# Altium PCB VRM_BRD.PcbDoc
Units mil, origin at the board's own origin, x right, y up, seen from the top; angles counter-clockwise.
Board outline 3500 x 2000 mil, 2 copper layers (Top Layer, Bottom Layer); 16 components, 9 nets, 56 pads, 5 vias.
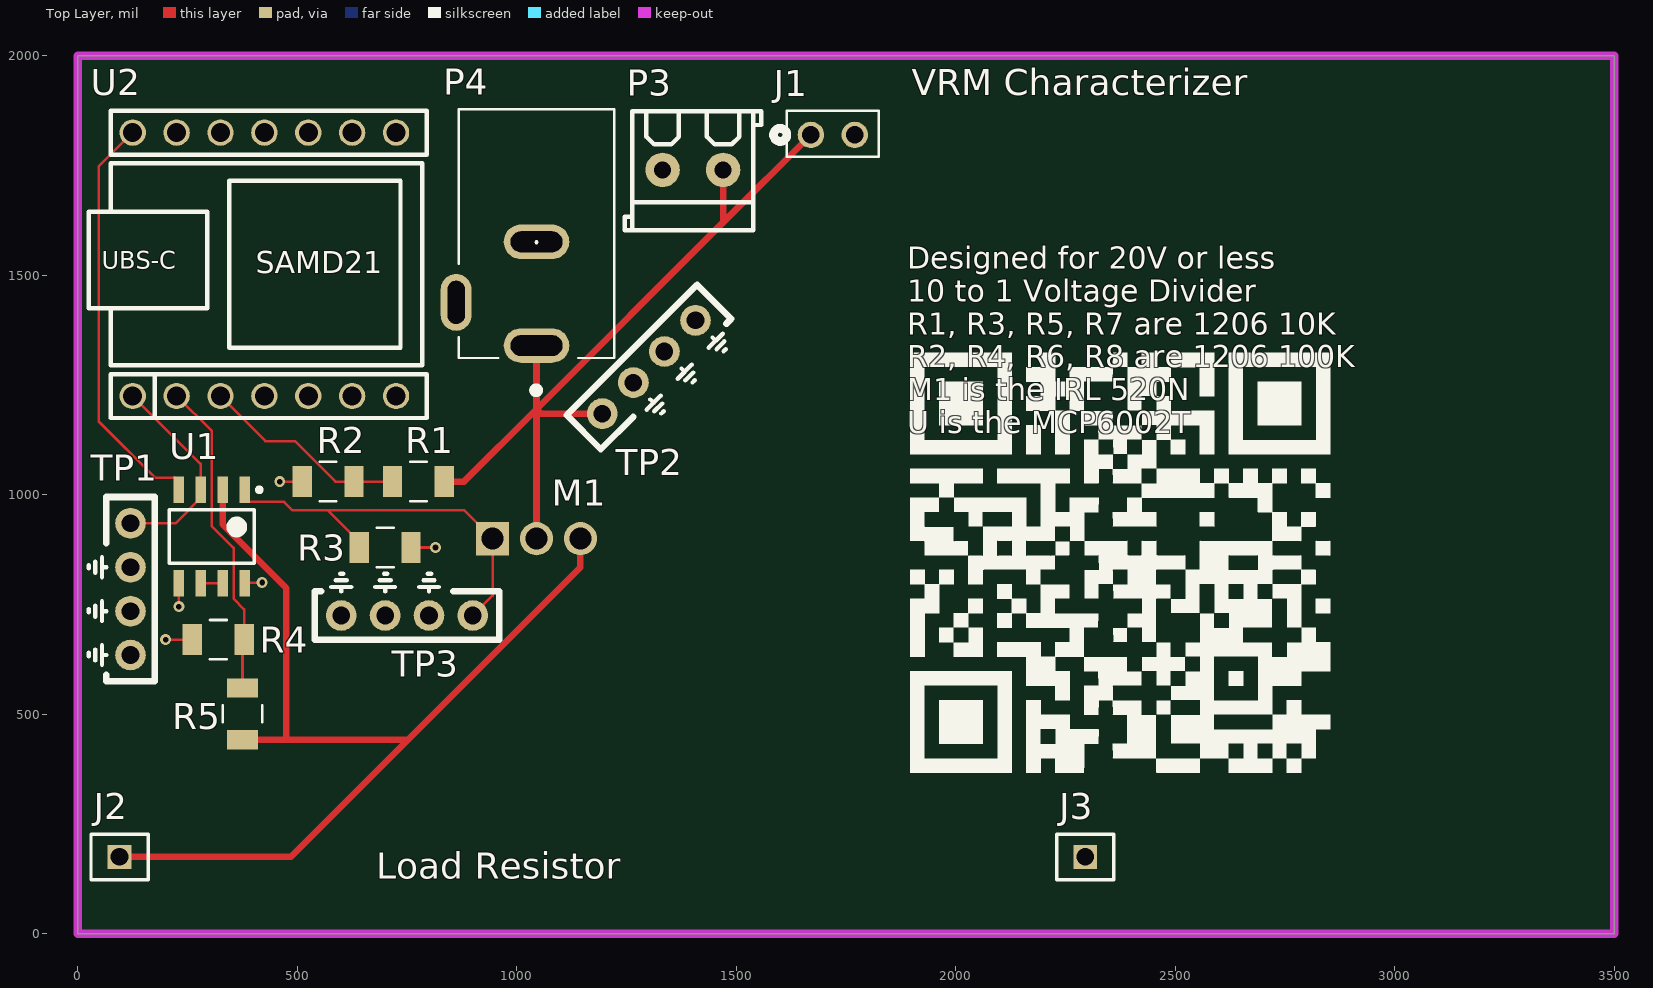
[diagram p0: Top Layer view]
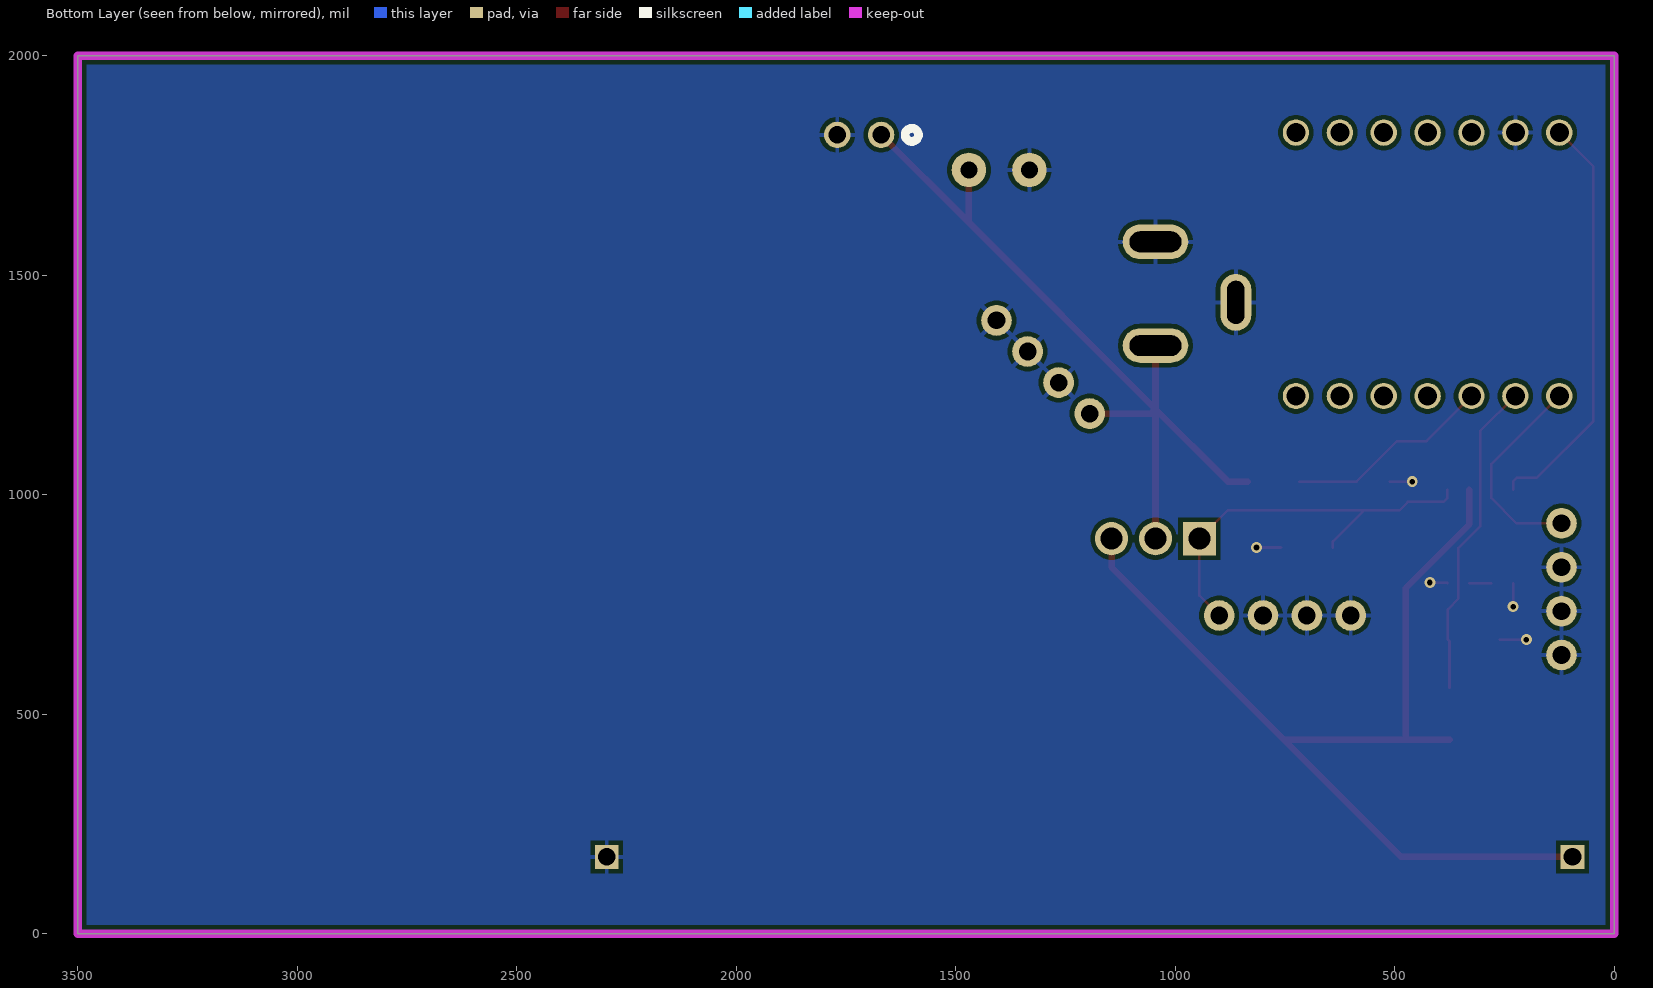
[diagram p1: Bottom Layer view, seen from below]
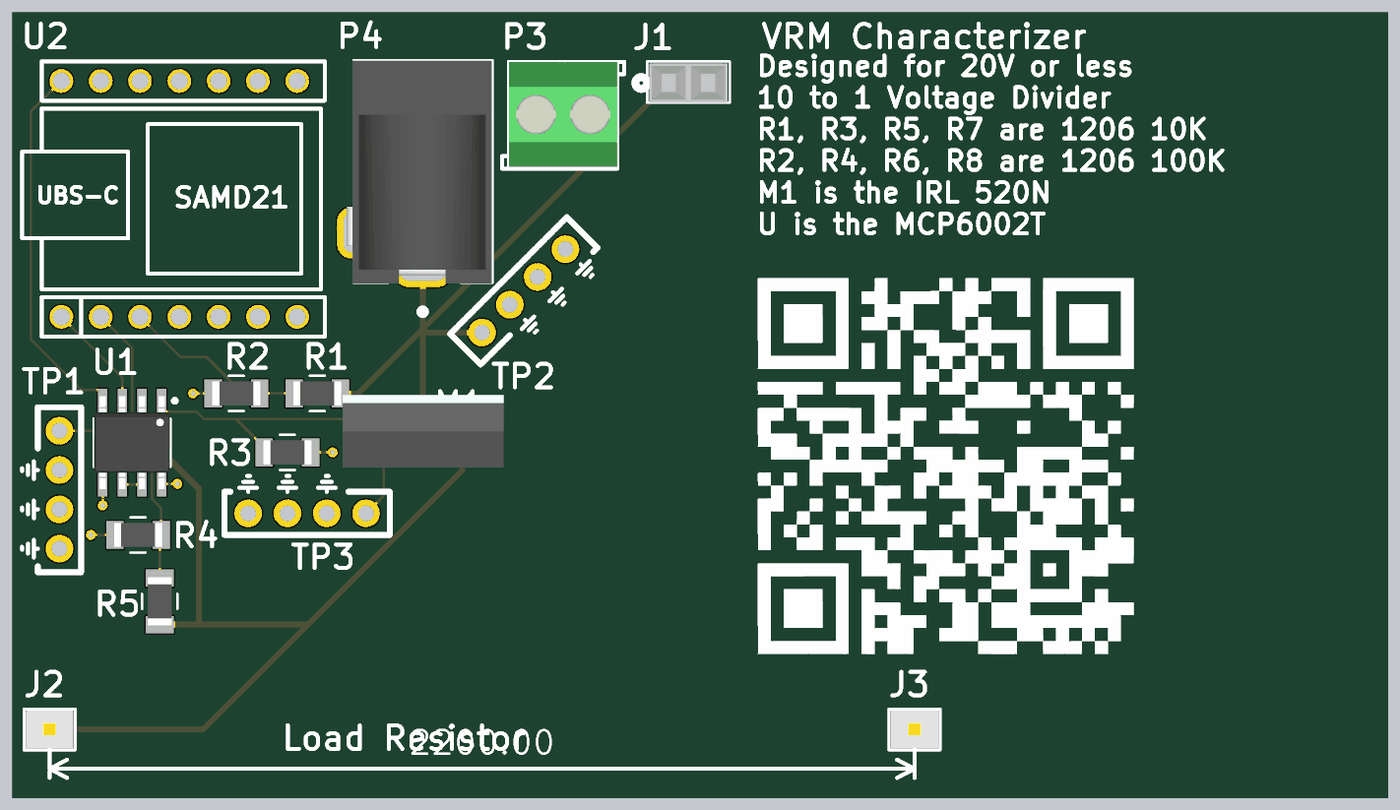
[diagram p2: 3D render of the assembled board from above, using the file's embedded part models]

## Layer stack, top to bottom
Top Solder: solder mask 0.4, Solder Resist, Dk 3.5
Top Layer: signal copper 1.4
Dielectric 1: dielectric 12.6, FR-4, Dk 4.8
Bottom Layer: signal copper 1.4
Bottom Solder: solder mask 0.4, Solder Resist, Dk 3.5

## Board outline
0,0 3500,0 3500,2000 0,2000

## Design rules (kind name [scope] priority, off if disabled: settings)
BoardOutlineClearance [All] p1: gap=10 ignorepadtopadclearanceinfootprint=FALSE except(0: Arc-SplitContinuation Track-SplitContinuation SMDPad-SplitContinuation THPad-SplitContinuation Via-SplitContinuation Fill-SplitContinuation Poly-SplitContinuation Region-SplitContinuation Text-SplitContinuation)
Clearance [All] p1: gap=10 ignorepadtopadclearanceinfootprint=FALSE except(0: Arc-Hole Track-Hole SMDPad-Hole THPad-Hole Via-Hole Fill-Hole Poly-Hole Region-Hole Text-Hole)
PlaneConnect [All] p1: planeconnectstyle=Direct reliefexpansion=20 reliefentries=4 reliefconductorwidth=10 reliefairgap=10
PolygonConnect [All] p1: thpad.connectstyle=Relief thpad.reliefconductorwidth=10 thpad.reliefentries=4 thpad.polygonreliefangle="90 Angle" thpad.airgapwidth=10 smdpad.connectstyle=Direct smdpad.reliefconductorwidth=10 smdpad.reliefentries=4 smdpad.polygonreliefangle="90 Angle" smdpad.airgapwidth=10 via.connectstyle=Direct via.reliefconductorwidth=10 via.reliefentries=4 via.polygonreliefangle="90 Angle" via.airgapwidth=10
RoutingVias [All] p1: holewidth=13 width=25 viastyle="Through Hole" minholewidth=13 minwidth=25 maxholewidth=60 maxwidth=80
SolderMaskExpansion [All] p1: expansion=4 istentingtop=FALSE
UnRoutedNet [All] p1: checkbadconnections=TRUE
Width "Schematic Width Constraint" [InNet('NetJ1_1')] p1: maxlimit=100 minlimit=15 preferedwidth=20 minimp=50.000000 maximp=50.000000 favimp=50.000000
Width [All] p2: maxlimit=100 minlimit=6 preferedwidth=6 minimp=50.000000 maximp=50.000000 favimp=50.000000
28 further rules are at their usual default settings.

## Components (designator, comment, footprint, x,y, rotation, side; value= is the part's Value field where it differs from the comment)
J1 "SSQ-102-02-G-S" JF-2_1X2_TU_SSQ 1720,1820 r0 top
J2 "SSQ-101-03-T-S" JF-1_SSQ-101-03-T-S 95,175 r0 top
J3 "SSQ-101-03-T-S" JF-1_SSQ-101-03-T-S 2295,175 r0 top
M1 "IRL520NPBF" TO254P469X1042X1967-3P 945,900 r0 top
P3 "2P Screw Terminal Block" "P_Terminal block 3.5mm-pitch" 1401.1,1740 r180 top
P4 "Power Jack" Power_Jack 1045,1340 r90 top value="CONN PWR JACK 2X5.5MM SOLDER"
R1 "10k" 1206_Passive_Resitor 776,1030 r180 top value=10KOhm
R2 "100KOhm" 1206_Passive_Resitor 570,1030 r0 top
R3 "10k" 1206_Passive_Resitor 700,880 r180 top value=10KOhm
R4 "100KOhm" 1206_Passive_Resitor 320,670 r0 top
R5 "10k" 1206_Passive_Resitor 375,501 r270 top value=10KOhm
TP1 "10x Probe TP" TP10x_Probe 120,785 r270 top
TP2 "10x Probe TP" TP10x_Probe 1301.07,1291.07 r45 top
TP3 "10x Probe TP" TP10x_Probe 750,725 r180 top
U1 "MCP6002T-I/SN" SOIC127P600X175-8N 305,905 r270 top
U2 "Seeeduino Xiao" SAMD21_Xiao 125,1225 r0 top

## Footprints (in the part's own frame and the unit in brackets; to place one, negate y for a bottom-side part, rotate by r counter-clockwise, add the part's x,y. Pads: shape width x height; smd on the part's side, far side on the other; paste and mask are expansions set on the pad)
1206_Passive_Resitor [mil]
  rect 44x71 smd: 1(-59,0) 2(59,0)
  silkscreen extent -19,-45 19,45, body extent -61,-31 61,31, height 26
JF-1_SSQ-101-03-T-S [mm]
  rect 1.37x1.37 / inner round 1.37 / far side rect 1.37x1.37 hole 1.02: 01(0,0)
  silkscreen extent -1.65,-1.32 1.65,1.32, body extent -1.52,-1.21 1.52,1.21, height 8.51
JF-2_1X2_TU_SSQ [mil]
  round 60 hole 40: 1(-50,0) 2(50,0)
  silkscreen extent -135,-50 105,55, body extent -99,-50 99,50, height 340
"P_Terminal block 3.5mm-pitch" [mm]
  round 2 hole 1: 1(-1.75,0) 2(1.75,0)
  silkscreen extent -3.95,-3.4 3.95,3.5, body extent -3.5,-3.4 3.5,3.4, height 8.4
Power_Jack [mm]
  oval 2x3.8 hole 1.2 slot 3 at 90 deg: 1(0,0) 2(6,0)
  oval 3.3x1.8 hole 1 slot 2.5 at 0 deg: 3(2.5,4.65)
  silkscreen extent -2.79,-4.5 13.68,4.5, body extent -0.76,-4.45 13.64,4.95, height 11.49
SAMD21_Xiao [mil]
  round 60 hole 43.31: 1(0,0) 2(100,0) 3(200,0) 4(300,0) 5(400,0) 6(500,0) 7(600,0) 8(600,600) 9(500,600) 10(400,600) 11(300,600) 12(200,600) 13(100,600) 14(0,600)
  silkscreen extent -100,-50 670,650
SOIC127P600X175-8N [mm] "SOIC, 8-Leads, Body 4.90x3.90mm, Pitch 1.27mm, IPC Medium Density"
  rect 1.55x0.6 smd: 1(-2.7,1.905) 2(-2.7,0.635) 3(-2.7,-0.635) 4(-2.7,-1.905) 5(2.7,-1.905) 6(2.7,-0.635) 7(2.7,0.635) 8(2.7,1.905)
  silkscreen extent -2.82,-2.45 1.55,2.88, body extent -3,-2.45 3,2.45, height 1.75
TO254P469X1042X1967-3P [mm]
  rect 1.92x1.92 hole 1.28: 1(0,0)
  round 1.92 hole 1.28: 2(2.54,0) 3(5.08,0)
  body extent -2.67,-1.5 7.75,3.19, height 18.84
TP10x_Probe [mil] "Small Probs footprint"
  round 70 hole 40: 1(-150,0) 2(-50,0) 2(50,0) 2(150,0)
  silkscreen extent -210,-95 210,55

## Part data
J1: library part JF_2_PIN_FEMALE, "2.54mm Straight 1x2P 2 1 Straight,P=2.54mm  Female Headers ROHSon Available", LCSC PART#=C49661, MFR PART #=C49661, MFR PN=SSQ-102-02-G-S
J2 J3: library part JF_1_PIN_FEMALE, "SSQ Series .100 Tiger Buyâ„¢ Socket Strip, Square Tail", LCSC PART#=C2883837, MFR PART #=X6511FV-01-C85D32, MP=SSQ-101-03-T-S
M1: library part Q_Nch_MOSFET_PTH, "MOSFET (N-Channel)  IRL520NPBF", Manufacturer_Name=Infineon, Mouser Part Number=942-IRL520NPBF, Arrow Part Number=IRL520NPBF, Arrow Price/Stock=https://www.arrow.com/en/products/irl520npbf/infineon-technologies-ag?region=nac, Datasheet Link=https://www.infineon.com/dgdl/irl520npbf.pdf?fileId=5546d462533600a40153565f9b62255b, Height=4.69mm, Manufacturer_Part_Number=IRL520NPBF, Mouser Price/Stock=https://www.mouser.co.uk/ProductDetail/Infineon-IR/IRL520NPBF?qs=9%252BKlkBgLFf3eZ5ppEpIaKQ%3D%3D
P3: library part "P_Terminal block", "Green Straight pin 3.5mm  pitch; P=3.5mm  Screw terminal ROHS", LCSC PART#=C474892, Manufacturer="Cixi Kefa Elec", MFR PART #=KF350-3.5-2P, Datasheet=https://datasheet.lcsc.com/lcsc/2001160007_Cixi-Kefa-Elec-KF350-3-5-2P_C474892.pdf
P4: library part "P_Power Jack", "Power Barrel Connector Jack 2.10mm ID (0.083\"), 5.50mm OD (0.217\") Through Hole, Right Angle", LCSC PART#=C136744, MFR PART #=PJ-102A, Digikey Link=https://www.digikey.com/product-detail/en/PJ-102A/CP-102A-ND/275425/?itemSeq=304982367, Type=Extended
R1 R3 R5: library part R_10KOhm_1206, "10 kOhms ±5% 0.25W, 1/4W Chip Resistor 1206 (3216 Metric) Automotive AEC-Q200 Thick Film", LCSC PART#=C17902, MFR PART #=RMCF1206FT10K0, Digikey Link=https://www.digikey.com/en/products/detail/stackpole-electronics-inc/RMCF1206FT10K0/1759669, Type=Basic
R2 R4: library part R_100KOhm_1206, "100kΩ ±1% 0.25W ±100ppm/℃ 1206 Chip Resistor - Surface Mount RoHS", LCSC PART#=C17900, MFR PART #=1206W4F1003T5E, Datasheet=https://datasheet.lcsc.com/lcsc/1810301421_UNI-ROYAL-Uniroyal-Elec-1206W4F1003T5E_C17900.pdf, Type=Basic
TP1 TP2 TP3: library part TP_10x_Probe, "Test Point 300 mil centers"
U1: library part U_MCP6002T-I/SN, "0.6 V/us 2 1MHz 1.8V ~ 6V 100μA General Purpose SOIC-8_150mil  Operational Amplifier ROHS", LCSC PART#=C7377, Mfr=Microchip, Datasheet=https://ww1.microchip.com/downloads/en/DeviceDoc/MCP6001-1R-1U-2-4-1-MHz-Low-Power-Op-Amp-DS20001733L.pdf, MFR PART #=MCP6002T-I/SN, Type=Basic
U2: library part U_SAMD21_Xiao, "Seeeduino XIAO - Arduino Microcontroller - SAMD21 Cortex M0+", Link=https://www.seeedstudio.com/Seeeduino-XIAO-Arduino-Microcontroller-SAMD21-Cortex-M0+-p-4426.html

## Via types
v1: diameter 25, hole 13, Top Layer to Bottom Layer, 5 vias

## Nets (pads, with @x,y where several pads share a name; then routed paths per layer and width w, separated by ;. In a path a pad name is that pad's centre, name@x,y a point inside that pad or via, vN(x,y) a via of type N, cw(c..) or ccw(c..) an arc to the next point about the centre after c; other vN are vias at no path point)
Drain: R1.2 R2.2 U2.3 | length 472.8
  Top Layer w6: U2.3 427.67,1122.33 494.55,1122.33 586.88,1030 R2.2 R1.2
GND: J1.2 J3.01 P3.2 P4.2 P4.3 R2.1 R3.1 R4.1 TP1.2 TP2.2 TP3.2 U1.5 U1.8 U2.13 | length 262.2
  Top Layer w6: v1(200,670) R4.1 ; v1(230,745) U1.5 ; U1.8 381.3,800 v1(420,800) ; v1(460,1030) R2.1 ; R3.1 v1(815,880)
NetJ1_1: J1.1 M1.2 P3.1 P4.1 R1.1 TP2.1 | length 1876.7
  Top Layer w15: R1.1 880,1030 1045,1195 ; M1.2@1045,899.66 M1.2 1045,1195 ; P4.1 1045,1195 ; TP2.1 1055,1185 1045,1195 ; P3.1 1470,1620 ; J1.1 1470,1620 ; 1045,1195 1470,1620
NetJ2_01: J2.01 M1.3 R5.2 U1.2 | length 2394.7
  Top Layer w15: J2.01 485,175 752,442 ; U1.2 330,932.43 475,787.43 475,442 ; R5.2 475,442 ; M1.3 1145,835 752,442 ; 475,442 752,442
NetM1_1: M1.1 R3.2 TP3.1 U1.1 | length 929.7
  Top Layer w6: U1.1 380,992.6 388.81,983.79 469.76,983.79 488.99,964.56 569.94,964.56 ; R3.2 641,893.5 569.94,964.56 ; TP3.1 945,770 M1.1 880.44,964.56 569.94,964.56
NetTP1_1: TP1.1 U1.3 U2.1 | length 480.5
  Top Layer w6: TP1.1 222.4,935 280,992.6 U1.3 280,1070 U2.1
NetU1_4: U1.4 U2.14 | length 947.8
  Top Layer w6: U2.14 47.49,1747.49 47.49,1167.51 176.19,1038.81 221.19,1038.81 230,1030 U1.4
NetU1_6: U1.6 U1.7 | length 50
  Top Layer w6: U1.6 U1.7
Source: R4.2 R5.1 U2.2 | length 730.4
  Top Layer w6: U2.2 305.19,1144.81 305.19,928.25 354.81,878.62 354.81,763.18 379,738.99 R4.2 375,666 R5.1
pads on no net: U2.4 U2.5 U2.6 U2.7 U2.8 U2.9 U2.10 U2.11 U2.12

## Polygon pours and split planes (outlines as drawn)
GND on Bottom Layer "GND_L02_P000" (solid, pour order 0): 0,2000 3500,2000 3500,0 0,0

## Keep-outs
Keep-Out Layer:
  the board outline again, w20

## Silkscreen, mask and mechanical layers (free items; w line width, h text height)
Top Overlay:
  drawing of 22 lines, arcs and shapes, not listed
  text "VRM Characterizer" at 1900,1910 h60
  text "Designed for 20V or less / 10 to 1 Voltage Divider / R1, R3, R5, R7 are 1206 10K / R2, R4, R6, R8 are 1206 100K / M1 is the IRL 520N / U is the MCP6002T" at 1890,1140 h50
  text "Load Resistor" at 680,125 h60

## Dimensions
2295,175 to 95,175 on Top Overlay

## Text inside footprints (layer, text, board x,y; h text height)
U2: Top Overlay "SAMD21" at 405,1505 h50; Top Overlay "UBS-C" at 55,1515 h40